# EAGLE board LilyPad_Vibeboard_Panel_v11 (EAGLE 6.5.0)
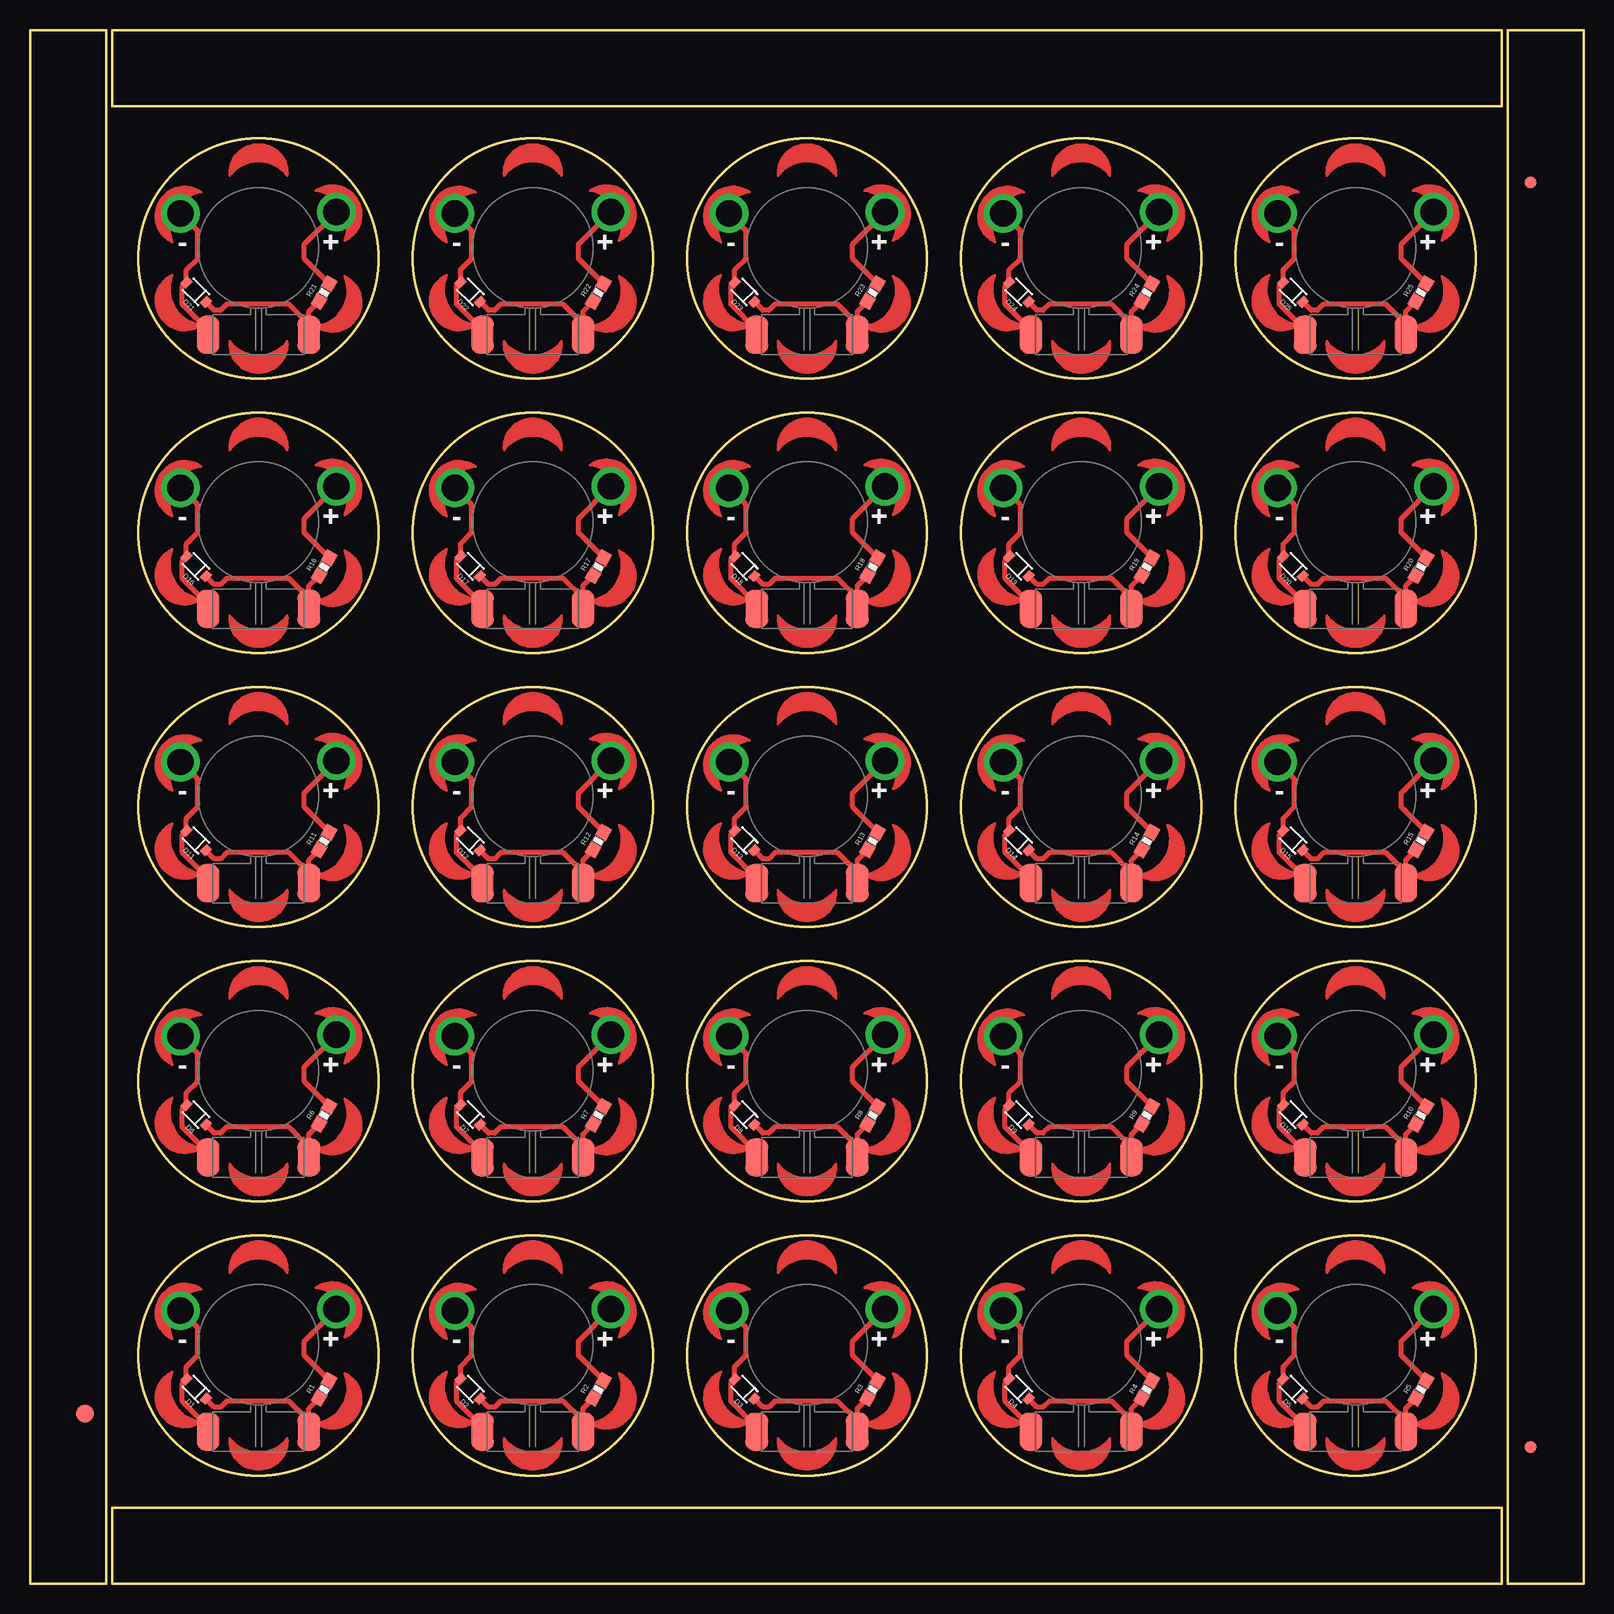
[diagram p0: board, top side]
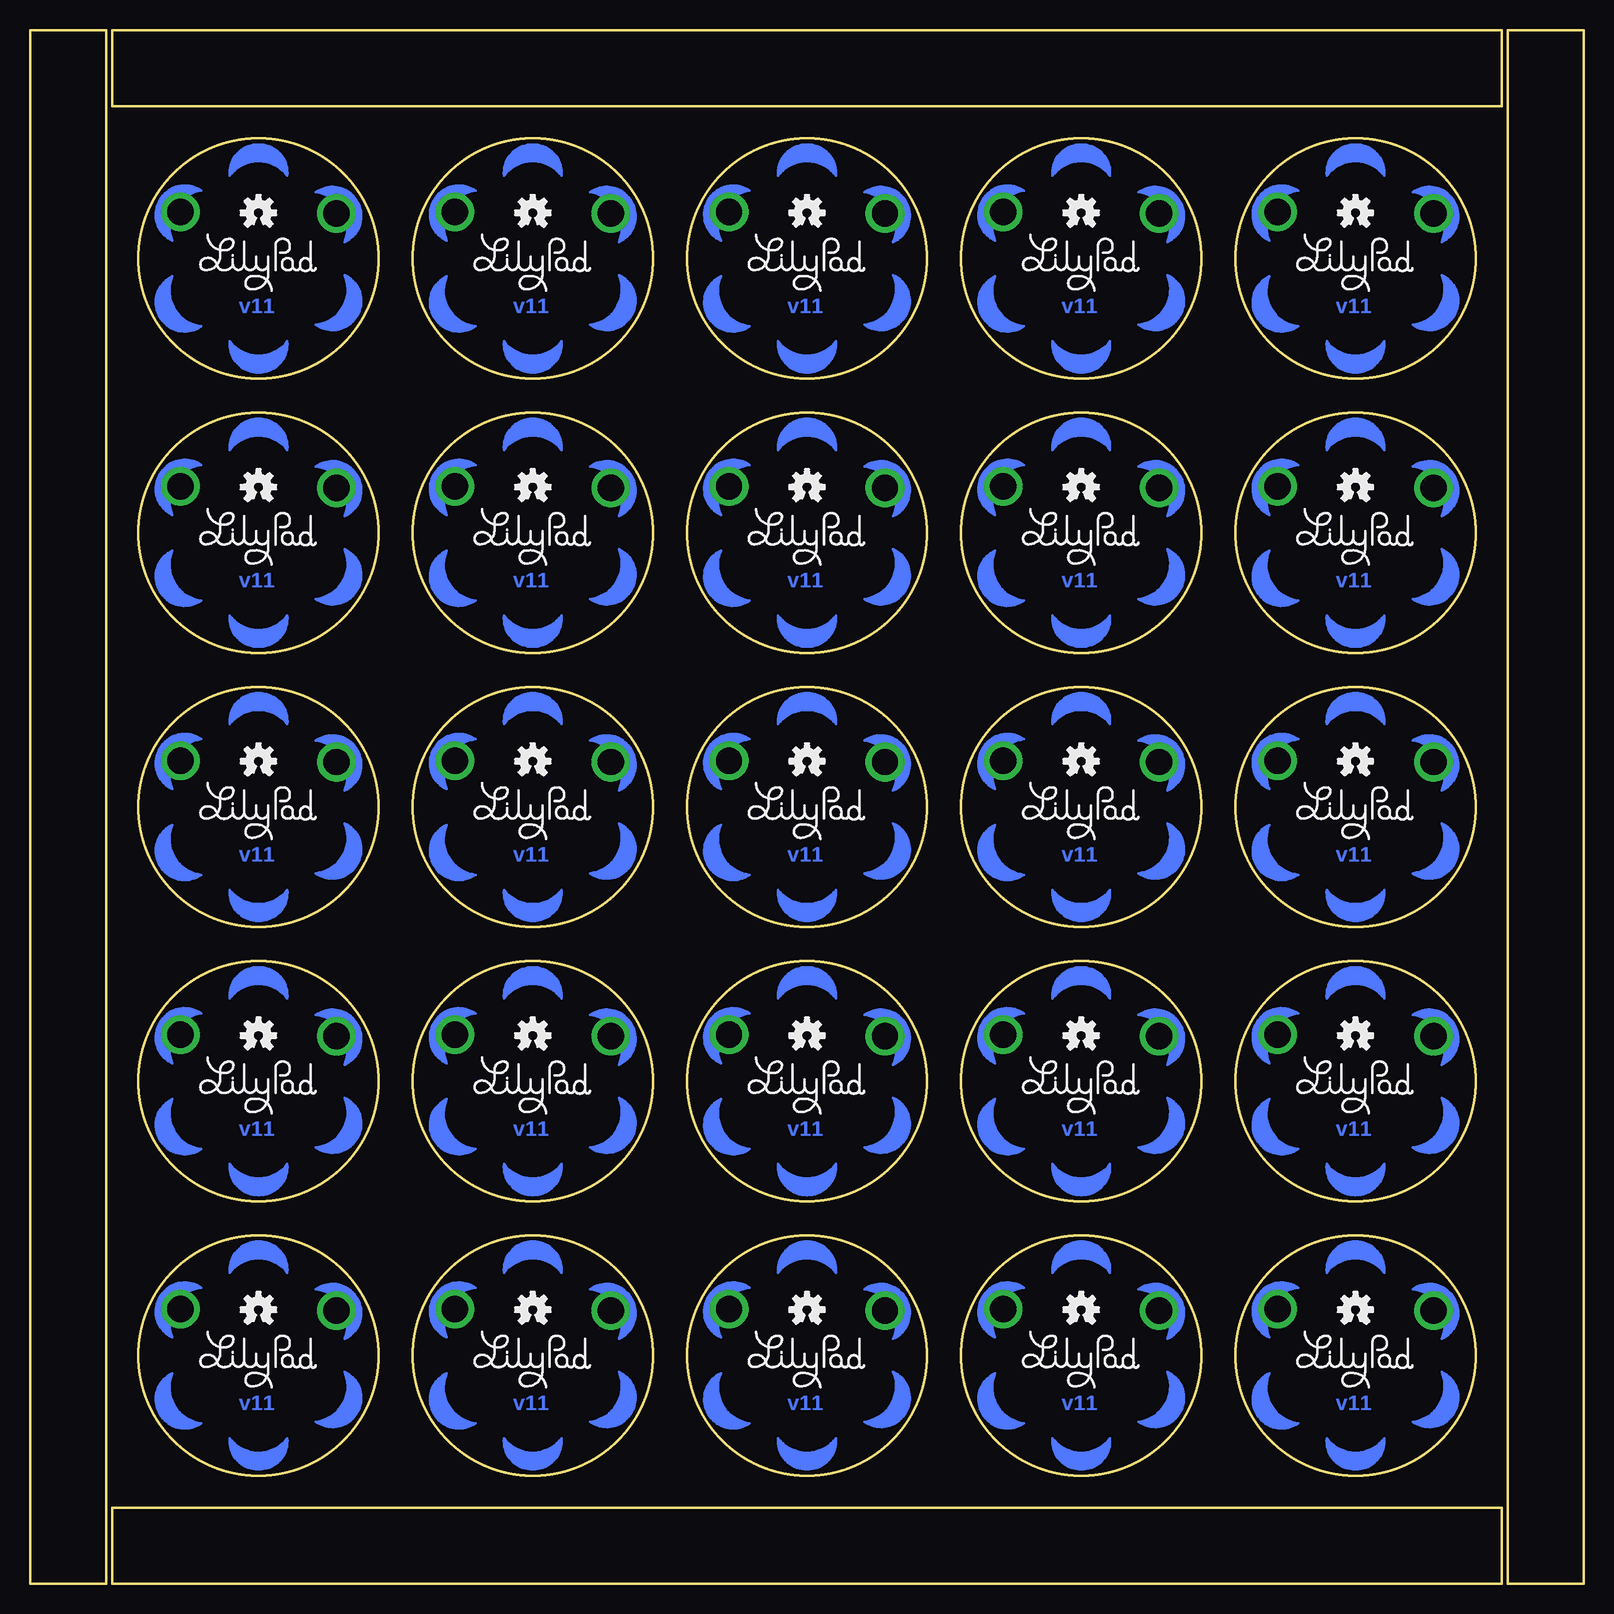
[diagram p1: board, bottom side, seen from below]

Size 129.54 x 129.54 mm. Coordinates in mm from the lower left corner, seen from the top.
Outline: 6.35,0 6.35,129.54 0,129.54 0,0 6.35,0
Outline: 6.86,0 122.68,0 122.68,6.35 6.86,6.35 6.86,0
Outline: 129.54,0 129.54,129.54 123.19,129.54 123.19,0 129.54,0
Outline: 122.68,129.54 6.86,129.54 6.86,123.19 122.68,123.19 122.68,129.54
Outline: circle at 19.05,19.05 radius 10
Outline: circle at 41.91,19.05 radius 10
Outline: circle at 64.77,19.05 radius 10
Outline: circle at 87.63,19.05 radius 10
Outline: circle at 110.49,19.05 radius 10
Outline: circle at 19.05,41.91 radius 10
Outline: circle at 41.91,41.91 radius 10
Outline: circle at 64.77,41.91 radius 10
Outline: circle at 87.63,41.91 radius 10
Outline: circle at 110.49,41.91 radius 10
Outline: circle at 19.05,64.77 radius 10
Outline: circle at 41.91,64.77 radius 10
Outline: circle at 64.77,64.77 radius 10
Outline: circle at 87.63,64.77 radius 10
Outline: circle at 110.49,64.77 radius 10
Outline: circle at 19.05,87.63 radius 10
Outline: circle at 41.91,87.63 radius 10
Outline: circle at 64.77,87.63 radius 10
Outline: circle at 87.63,87.63 radius 10
Outline: circle at 110.49,87.63 radius 10
Copper layers (1*16): Top 0.035mm / dielectric 1.5mm / Bottom 0.035mm
Design rules "SparkFun *": minimum track width 7mil, minimum drill 15mil, track to track 8mil, track to pad 8mil, pad to pad 8mil, via to via 8mil, smd to smd 8mil, copper to edge 8mil, drill to drill 8mil, minimum pad ring 12mil, minimum via ring 10mil, stop-mask expansion 4mil, vias tented up to drill 20mil, thermal gap 10mil

## Footprints (pad centres in the part's own frame; a part is rotated, then mirrored left to right if it is on the bottom)
SOD-323 = smd 0.63 x 0.83: 1 -1.15,0; 2 1.15,0
FIDUCIAL-1.5X3 = smd 1.5 x 1.5: 1 0,0
FIDUCIAL-1X2 = smd 1 x 1: 1 0,0
VIBE-MOTOR-10MM-SMD = smd 1.905 x 3.175: P$1 4.191,-7.239; P$2 -4.191,-7.239
0603-RES = smd 1.1 x 1: 1 -0.85,0; 2 0.85,0
PETAL-SMALL-2SIDE = drill 2.2: 1 0,0

## Placement (x,y rotation side)
D1  [SOD-323]  13.84,16.26 135 top
D2  [SOD-323]  36.7,16.26 135 top
D3  [SOD-323]  59.56,16.26 135 top
D4  [SOD-323]  82.42,16.26 135 top
D5  [SOD-323]  105.28,16.26 135 top
D6  [SOD-323]  13.84,39.12 135 top
D7  [SOD-323]  36.7,39.12 135 top
D8  [SOD-323]  59.56,39.12 135 top
D9  [SOD-323]  82.42,39.12 135 top
D10  [SOD-323]  105.28,39.12 135 top
D11  [SOD-323]  13.84,61.98 135 top
D12  [SOD-323]  36.7,61.98 135 top
D13  [SOD-323]  59.56,61.98 135 top
D14  [SOD-323]  82.42,61.98 135 top
D15  [SOD-323]  105.28,61.98 135 top
D16  [SOD-323]  13.84,84.84 135 top
D17  [SOD-323]  36.7,84.84 135 top
D18  [SOD-323]  59.56,84.84 135 top
D19  [SOD-323]  82.42,84.84 135 top
D20  [SOD-323]  105.28,84.84 135 top
D21  [SOD-323]  13.84,107.7 135 top
D22  [SOD-323]  36.7,107.7 135 top
D23  [SOD-323]  59.56,107.7 135 top
D24  [SOD-323]  82.42,107.7 135 top
D25  [SOD-323]  105.28,107.7 135 top
E$1  [FIDUCIAL-1.5X3]  4.57,14.22 0 top
E$4  [FIDUCIAL-1X2]  125.09,11.43 0 top
E$5  [FIDUCIAL-1X2]  125.09,116.84 180 top
LOGO1  OSHW-LOGOS  [OSHW-LOGO-S]  19.05,22.86 0 bottom
LOGO2  OSHW-LOGOS  [OSHW-LOGO-S]  41.91,22.86 0 bottom
LOGO3  OSHW-LOGOS  [OSHW-LOGO-S]  64.77,22.86 0 bottom
LOGO4  OSHW-LOGOS  [OSHW-LOGO-S]  87.63,22.86 0 bottom
LOGO5  OSHW-LOGOS  [OSHW-LOGO-S]  110.49,22.86 0 bottom
LOGO6  OSHW-LOGOS  [OSHW-LOGO-S]  19.05,45.72 0 bottom
LOGO7  OSHW-LOGOS  [OSHW-LOGO-S]  41.91,45.72 0 bottom
LOGO8  OSHW-LOGOS  [OSHW-LOGO-S]  64.77,45.72 0 bottom
LOGO9  OSHW-LOGOS  [OSHW-LOGO-S]  87.63,45.72 0 bottom
LOGO10  OSHW-LOGOS  [OSHW-LOGO-S]  110.49,45.72 0 bottom
LOGO11  OSHW-LOGOS  [OSHW-LOGO-S]  19.05,68.58 0 bottom
LOGO12  OSHW-LOGOS  [OSHW-LOGO-S]  41.91,68.58 0 bottom
LOGO13  OSHW-LOGOS  [OSHW-LOGO-S]  64.77,68.58 0 bottom
LOGO14  OSHW-LOGOS  [OSHW-LOGO-S]  87.63,68.58 0 bottom
LOGO15  OSHW-LOGOS  [OSHW-LOGO-S]  110.49,68.58 0 bottom
LOGO16  OSHW-LOGOS  [OSHW-LOGO-S]  19.05,91.44 0 bottom
LOGO17  OSHW-LOGOS  [OSHW-LOGO-S]  41.91,91.44 0 bottom
LOGO18  OSHW-LOGOS  [OSHW-LOGO-S]  64.77,91.44 0 bottom
LOGO19  OSHW-LOGOS  [OSHW-LOGO-S]  87.63,91.44 0 bottom
LOGO20  OSHW-LOGOS  [OSHW-LOGO-S]  110.49,91.44 0 bottom
LOGO21  OSHW-LOGOS  [OSHW-LOGO-S]  19.05,114.3 0 bottom
LOGO22  OSHW-LOGOS  [OSHW-LOGO-S]  41.91,114.3 0 bottom
LOGO23  OSHW-LOGOS  [OSHW-LOGO-S]  64.77,114.3 0 bottom
LOGO24  OSHW-LOGOS  [OSHW-LOGO-S]  87.63,114.3 0 bottom
LOGO25  OSHW-LOGOS  [OSHW-LOGO-S]  110.49,114.3 0 bottom
M1  MOTORSMD  [VIBE-MOTOR-10MM-SMD]  19.05,19.94 0 top
M2  MOTORSMD  [VIBE-MOTOR-10MM-SMD]  41.91,19.94 0 top
M3  MOTORSMD  [VIBE-MOTOR-10MM-SMD]  64.77,19.94 0 top
M4  MOTORSMD  [VIBE-MOTOR-10MM-SMD]  87.63,19.94 0 top
M5  MOTORSMD  [VIBE-MOTOR-10MM-SMD]  110.49,19.94 0 top
M6  MOTORSMD  [VIBE-MOTOR-10MM-SMD]  19.05,42.8 0 top
M7  MOTORSMD  [VIBE-MOTOR-10MM-SMD]  41.91,42.8 0 top
M8  MOTORSMD  [VIBE-MOTOR-10MM-SMD]  64.77,42.8 0 top
M9  MOTORSMD  [VIBE-MOTOR-10MM-SMD]  87.63,42.8 0 top
M10  MOTORSMD  [VIBE-MOTOR-10MM-SMD]  110.49,42.8 0 top
M11  MOTORSMD  [VIBE-MOTOR-10MM-SMD]  19.05,65.66 0 top
M12  MOTORSMD  [VIBE-MOTOR-10MM-SMD]  41.91,65.66 0 top
M13  MOTORSMD  [VIBE-MOTOR-10MM-SMD]  64.77,65.66 0 top
M14  MOTORSMD  [VIBE-MOTOR-10MM-SMD]  87.63,65.66 0 top
M15  MOTORSMD  [VIBE-MOTOR-10MM-SMD]  110.49,65.66 0 top
M16  MOTORSMD  [VIBE-MOTOR-10MM-SMD]  19.05,88.52 0 top
M17  MOTORSMD  [VIBE-MOTOR-10MM-SMD]  41.91,88.52 0 top
M18  MOTORSMD  [VIBE-MOTOR-10MM-SMD]  64.77,88.52 0 top
M19  MOTORSMD  [VIBE-MOTOR-10MM-SMD]  87.63,88.52 0 top
M20  MOTORSMD  [VIBE-MOTOR-10MM-SMD]  110.49,88.52 0 top
M21  MOTORSMD  [VIBE-MOTOR-10MM-SMD]  19.05,111.38 0 top
M22  MOTORSMD  [VIBE-MOTOR-10MM-SMD]  41.91,111.38 0 top
M23  MOTORSMD  [VIBE-MOTOR-10MM-SMD]  64.77,111.38 0 top
M24  MOTORSMD  [VIBE-MOTOR-10MM-SMD]  87.63,111.38 0 top
M25  MOTORSMD  [VIBE-MOTOR-10MM-SMD]  110.49,111.38 0 top
R1  33  [0603-RES]  24.52,16.22 60 top
R2  33  [0603-RES]  47.38,16.22 60 top
R3  33  [0603-RES]  70.24,16.22 60 top
R4  33  [0603-RES]  93.1,16.22 60 top
R5  33  [0603-RES]  115.96,16.22 60 top
R6  33  [0603-RES]  24.52,39.08 60 top
R7  33  [0603-RES]  47.38,39.08 60 top
R8  33  [0603-RES]  70.24,39.08 60 top
R9  33  [0603-RES]  93.1,39.08 60 top
R10  33  [0603-RES]  115.96,39.08 60 top
R11  33  [0603-RES]  24.52,61.94 60 top
R12  33  [0603-RES]  47.38,61.94 60 top
R13  33  [0603-RES]  70.24,61.94 60 top
R14  33  [0603-RES]  93.1,61.94 60 top
R15  33  [0603-RES]  115.96,61.94 60 top
R16  33  [0603-RES]  24.52,84.8 60 top
R17  33  [0603-RES]  47.38,84.8 60 top
R18  33  [0603-RES]  70.24,84.8 60 top
R19  33  [0603-RES]  93.1,84.8 60 top
R20  33  [0603-RES]  115.96,84.8 60 top
R21  33  [0603-RES]  24.52,107.66 60 top
R22  33  [0603-RES]  47.38,107.66 60 top
R23  33  [0603-RES]  70.24,107.66 60 top
R24  33  [0603-RES]  93.1,107.66 60 top
R25  33  [0603-RES]  115.96,107.66 60 top
U$1  LOGO-LPLP  [LOGO-LILYPAD]  41.91,19.05 0 bottom
U$2  LOGO-LPLP  [LOGO-LILYPAD]  19.05,19.05 0 bottom
U$3  LOGO-LPLP  [LOGO-LILYPAD]  64.77,19.05 0 bottom
U$4  LOGO-LPLP  [LOGO-LILYPAD]  87.63,19.05 0 bottom
U$5  LOGO-LPLP  [LOGO-LILYPAD]  110.49,19.05 0 bottom
U$6  LOGO-LPLP  [LOGO-LILYPAD]  19.05,41.91 0 bottom
U$7  LOGO-LPLP  [LOGO-LILYPAD]  41.91,41.91 0 bottom
U$8  LOGO-LPLP  [LOGO-LILYPAD]  64.77,41.91 0 bottom
U$9  LOGO-LPLP  [LOGO-LILYPAD]  87.63,41.91 0 bottom
U$10  LOGO-LPLP  [LOGO-LILYPAD]  110.49,41.91 0 bottom
U$11  LOGO-LPLP  [LOGO-LILYPAD]  19.05,64.77 0 bottom
U$12  LOGO-LPLP  [LOGO-LILYPAD]  41.91,64.77 0 bottom
U$13  LOGO-LPLP  [LOGO-LILYPAD]  64.77,64.77 0 bottom
U$14  LOGO-LPLP  [LOGO-LILYPAD]  87.63,64.77 0 bottom
U$15  LOGO-LPLP  [LOGO-LILYPAD]  110.49,64.77 0 bottom
U$16  LOGO-LPLP  [LOGO-LILYPAD]  19.05,87.63 0 bottom
U$17  LOGO-LPLP  [LOGO-LILYPAD]  41.91,87.63 0 bottom
U$18  LOGO-LPLP  [LOGO-LILYPAD]  64.77,87.63 0 bottom
U$19  LOGO-LPLP  [LOGO-LILYPAD]  87.63,87.63 0 bottom
U$20  LOGO-LPLP  [LOGO-LILYPAD]  110.49,87.63 0 bottom
U$21  LOGO-LPLP  [LOGO-LILYPAD]  19.05,110.49 0 bottom
U$22  LOGO-LPLP  [LOGO-LILYPAD]  41.91,110.49 0 bottom
U$23  LOGO-LPLP  [LOGO-LILYPAD]  64.77,110.49 0 bottom
U$24  LOGO-LPLP  [LOGO-LILYPAD]  87.63,110.49 0 bottom
U$25  LOGO-LPLP  [LOGO-LILYPAD]  110.49,110.49 0 bottom
VIBE1  SEWTAP-NOHOLE2  [PETAL-NOHOLE-2SIDE]  12.55,15.3 300 top
VIBE2  SEWTAP-NOHOLEW-MASK  [PETAL-NOHOLE-2SIDE-SPECIAL-W-MASK]  19.05,11.55 0 top
VIBE3  SEWTAP-NOHOLE2  [PETAL-NOHOLE-2SIDE]  25.55,15.18 60 top
VIBE4  SEWTAP-NOHOLE2  [PETAL-NOHOLE-2SIDE]  19.05,26.55 180 top
VIBE5  SEWTAP-NOHOLE2  [PETAL-NOHOLE-2SIDE]  48.41,15.18 60 top
VIBE6  SEWTAP-NOHOLEW-MASK  [PETAL-NOHOLE-2SIDE-SPECIAL-W-MASK]  41.91,11.55 0 top
VIBE7  SEWTAP-NOHOLE2  [PETAL-NOHOLE-2SIDE]  35.41,15.3 300 top
VIBE8  SEWTAP-NOHOLE2  [PETAL-NOHOLE-2SIDE]  41.91,26.55 180 top
VIBE9  SEWTAP-NOHOLE2  [PETAL-NOHOLE-2SIDE]  71.27,15.18 60 top
VIBE10  SEWTAP-NOHOLEW-MASK  [PETAL-NOHOLE-2SIDE-SPECIAL-W-MASK]  64.77,11.55 0 top
VIBE11  SEWTAP-NOHOLE2  [PETAL-NOHOLE-2SIDE]  58.27,15.3 300 top
VIBE12  SEWTAP-NOHOLE2  [PETAL-NOHOLE-2SIDE]  64.77,26.55 180 top
VIBE13  SEWTAP-NOHOLE2  [PETAL-NOHOLE-2SIDE]  94.13,15.18 60 top
VIBE14  SEWTAP-NOHOLEW-MASK  [PETAL-NOHOLE-2SIDE-SPECIAL-W-MASK]  87.63,11.55 0 top
VIBE15  SEWTAP-NOHOLE2  [PETAL-NOHOLE-2SIDE]  81.13,15.3 300 top
VIBE16  SEWTAP-NOHOLE2  [PETAL-NOHOLE-2SIDE]  87.63,26.55 180 top
VIBE17  SEWTAP-NOHOLE2  [PETAL-NOHOLE-2SIDE]  116.99,15.18 60 top
VIBE18  SEWTAP-NOHOLEW-MASK  [PETAL-NOHOLE-2SIDE-SPECIAL-W-MASK]  110.49,11.55 0 top
VIBE19  SEWTAP-NOHOLE2  [PETAL-NOHOLE-2SIDE]  103.99,15.3 300 top
VIBE20  SEWTAP-NOHOLE2  [PETAL-NOHOLE-2SIDE]  110.49,26.55 180 top
VIBE21  SEWTAP-NOHOLE2  [PETAL-NOHOLE-2SIDE]  25.55,38.04 60 top
VIBE22  SEWTAP-NOHOLEW-MASK  [PETAL-NOHOLE-2SIDE-SPECIAL-W-MASK]  19.05,34.41 0 top
VIBE23  SEWTAP-NOHOLE2  [PETAL-NOHOLE-2SIDE]  12.55,38.16 300 top
VIBE24  SEWTAP-NOHOLE2  [PETAL-NOHOLE-2SIDE]  19.05,49.41 180 top
VIBE25  SEWTAP-NOHOLE2  [PETAL-NOHOLE-2SIDE]  48.41,38.04 60 top
VIBE26  SEWTAP-NOHOLEW-MASK  [PETAL-NOHOLE-2SIDE-SPECIAL-W-MASK]  41.91,34.41 0 top
VIBE27  SEWTAP-NOHOLE2  [PETAL-NOHOLE-2SIDE]  35.41,38.16 300 top
VIBE28  SEWTAP-NOHOLE2  [PETAL-NOHOLE-2SIDE]  41.91,49.41 180 top
VIBE29  SEWTAP-NOHOLE2  [PETAL-NOHOLE-2SIDE]  71.27,38.04 60 top
VIBE30  SEWTAP-NOHOLEW-MASK  [PETAL-NOHOLE-2SIDE-SPECIAL-W-MASK]  64.77,34.41 0 top
VIBE31  SEWTAP-NOHOLE2  [PETAL-NOHOLE-2SIDE]  58.27,38.16 300 top
VIBE32  SEWTAP-NOHOLE2  [PETAL-NOHOLE-2SIDE]  64.77,49.41 180 top
VIBE33  SEWTAP-NOHOLE2  [PETAL-NOHOLE-2SIDE]  94.13,38.04 60 top
VIBE34  SEWTAP-NOHOLEW-MASK  [PETAL-NOHOLE-2SIDE-SPECIAL-W-MASK]  87.63,34.41 0 top
VIBE35  SEWTAP-NOHOLE2  [PETAL-NOHOLE-2SIDE]  81.13,38.16 300 top
VIBE36  SEWTAP-NOHOLE2  [PETAL-NOHOLE-2SIDE]  87.63,49.41 180 top
VIBE37  SEWTAP-NOHOLE2  [PETAL-NOHOLE-2SIDE]  116.99,38.04 60 top
VIBE38  SEWTAP-NOHOLEW-MASK  [PETAL-NOHOLE-2SIDE-SPECIAL-W-MASK]  110.49,34.41 0 top
VIBE39  SEWTAP-NOHOLE2  [PETAL-NOHOLE-2SIDE]  103.99,38.16 300 top
VIBE40  SEWTAP-NOHOLE2  [PETAL-NOHOLE-2SIDE]  110.49,49.41 180 top
VIBE41  SEWTAP-NOHOLE2  [PETAL-NOHOLE-2SIDE]  25.55,60.9 60 top
VIBE42  SEWTAP-NOHOLEW-MASK  [PETAL-NOHOLE-2SIDE-SPECIAL-W-MASK]  19.05,57.27 0 top
VIBE43  SEWTAP-NOHOLE2  [PETAL-NOHOLE-2SIDE]  12.55,61.02 300 top
VIBE44  SEWTAP-NOHOLE2  [PETAL-NOHOLE-2SIDE]  19.05,72.27 180 top
VIBE45  SEWTAP-NOHOLE2  [PETAL-NOHOLE-2SIDE]  48.41,60.9 60 top
VIBE46  SEWTAP-NOHOLEW-MASK  [PETAL-NOHOLE-2SIDE-SPECIAL-W-MASK]  41.91,57.27 0 top
VIBE47  SEWTAP-NOHOLE2  [PETAL-NOHOLE-2SIDE]  35.41,61.02 300 top
VIBE48  SEWTAP-NOHOLE2  [PETAL-NOHOLE-2SIDE]  41.91,72.27 180 top
VIBE49  SEWTAP-NOHOLE2  [PETAL-NOHOLE-2SIDE]  71.27,60.9 60 top
VIBE50  SEWTAP-NOHOLEW-MASK  [PETAL-NOHOLE-2SIDE-SPECIAL-W-MASK]  64.77,57.27 0 top
VIBE51  SEWTAP-NOHOLE2  [PETAL-NOHOLE-2SIDE]  58.27,61.02 300 top
VIBE52  SEWTAP-NOHOLE2  [PETAL-NOHOLE-2SIDE]  64.77,72.27 180 top
VIBE53  SEWTAP-NOHOLE2  [PETAL-NOHOLE-2SIDE]  94.13,60.9 60 top
VIBE54  SEWTAP-NOHOLEW-MASK  [PETAL-NOHOLE-2SIDE-SPECIAL-W-MASK]  87.63,57.27 0 top
VIBE55  SEWTAP-NOHOLE2  [PETAL-NOHOLE-2SIDE]  81.13,61.02 300 top
VIBE56  SEWTAP-NOHOLE2  [PETAL-NOHOLE-2SIDE]  87.63,72.27 180 top
VIBE57  SEWTAP-NOHOLE2  [PETAL-NOHOLE-2SIDE]  116.99,60.9 60 top
VIBE58  SEWTAP-NOHOLEW-MASK  [PETAL-NOHOLE-2SIDE-SPECIAL-W-MASK]  110.49,57.27 0 top
VIBE59  SEWTAP-NOHOLE2  [PETAL-NOHOLE-2SIDE]  103.99,61.02 300 top
VIBE60  SEWTAP-NOHOLE2  [PETAL-NOHOLE-2SIDE]  110.49,72.27 180 top
VIBE61  SEWTAP-NOHOLE2  [PETAL-NOHOLE-2SIDE]  25.55,83.76 60 top
VIBE62  SEWTAP-NOHOLEW-MASK  [PETAL-NOHOLE-2SIDE-SPECIAL-W-MASK]  19.05,80.13 0 top
VIBE63  SEWTAP-NOHOLE2  [PETAL-NOHOLE-2SIDE]  12.55,83.88 300 top
VIBE64  SEWTAP-NOHOLE2  [PETAL-NOHOLE-2SIDE]  19.05,95.13 180 top
VIBE65  SEWTAP-NOHOLE2  [PETAL-NOHOLE-2SIDE]  48.41,83.76 60 top
VIBE66  SEWTAP-NOHOLEW-MASK  [PETAL-NOHOLE-2SIDE-SPECIAL-W-MASK]  41.91,80.13 0 top
VIBE67  SEWTAP-NOHOLE2  [PETAL-NOHOLE-2SIDE]  35.41,83.88 300 top
VIBE68  SEWTAP-NOHOLE2  [PETAL-NOHOLE-2SIDE]  41.91,95.13 180 top
VIBE69  SEWTAP-NOHOLE2  [PETAL-NOHOLE-2SIDE]  71.27,83.76 60 top
VIBE70  SEWTAP-NOHOLEW-MASK  [PETAL-NOHOLE-2SIDE-SPECIAL-W-MASK]  64.77,80.13 0 top
VIBE71  SEWTAP-NOHOLE2  [PETAL-NOHOLE-2SIDE]  58.27,83.88 300 top
VIBE72  SEWTAP-NOHOLE2  [PETAL-NOHOLE-2SIDE]  64.77,95.13 180 top
VIBE73  SEWTAP-NOHOLE2  [PETAL-NOHOLE-2SIDE]  94.13,83.76 60 top
VIBE74  SEWTAP-NOHOLEW-MASK  [PETAL-NOHOLE-2SIDE-SPECIAL-W-MASK]  87.63,80.13 0 top
VIBE75  SEWTAP-NOHOLE2  [PETAL-NOHOLE-2SIDE]  81.13,83.88 300 top
VIBE76  SEWTAP-NOHOLE2  [PETAL-NOHOLE-2SIDE]  87.63,95.13 180 top
VIBE77  SEWTAP-NOHOLE2  [PETAL-NOHOLE-2SIDE]  116.99,83.76 60 top
VIBE78  SEWTAP-NOHOLEW-MASK  [PETAL-NOHOLE-2SIDE-SPECIAL-W-MASK]  110.49,80.13 0 top
VIBE79  SEWTAP-NOHOLE2  [PETAL-NOHOLE-2SIDE]  103.99,83.88 300 top
VIBE80  SEWTAP-NOHOLE2  [PETAL-NOHOLE-2SIDE]  110.49,95.13 180 top
VIBE81  SEWTAP-NOHOLE2  [PETAL-NOHOLE-2SIDE]  25.55,106.62 60 top
VIBE82  SEWTAP-NOHOLEW-MASK  [PETAL-NOHOLE-2SIDE-SPECIAL-W-MASK]  19.05,102.99 0 top
VIBE83  SEWTAP-NOHOLE2  [PETAL-NOHOLE-2SIDE]  12.55,106.74 300 top
VIBE84  SEWTAP-NOHOLE2  [PETAL-NOHOLE-2SIDE]  19.05,117.99 180 top
VIBE85  SEWTAP-NOHOLE2  [PETAL-NOHOLE-2SIDE]  48.41,106.62 60 top
VIBE86  SEWTAP-NOHOLEW-MASK  [PETAL-NOHOLE-2SIDE-SPECIAL-W-MASK]  41.91,102.99 0 top
VIBE87  SEWTAP-NOHOLE2  [PETAL-NOHOLE-2SIDE]  35.41,106.74 300 top
VIBE88  SEWTAP-NOHOLE2  [PETAL-NOHOLE-2SIDE]  41.91,117.99 180 top
VIBE89  SEWTAP-NOHOLE2  [PETAL-NOHOLE-2SIDE]  71.27,106.62 60 top
VIBE90  SEWTAP-NOHOLEW-MASK  [PETAL-NOHOLE-2SIDE-SPECIAL-W-MASK]  64.77,102.99 0 top
VIBE91  SEWTAP-NOHOLE2  [PETAL-NOHOLE-2SIDE]  58.27,106.74 300 top
VIBE92  SEWTAP-NOHOLE2  [PETAL-NOHOLE-2SIDE]  64.77,117.99 180 top
VIBE93  SEWTAP-NOHOLE2  [PETAL-NOHOLE-2SIDE]  94.13,106.62 60 top
VIBE94  SEWTAP-NOHOLEW-MASK  [PETAL-NOHOLE-2SIDE-SPECIAL-W-MASK]  87.63,102.99 0 top
VIBE95  SEWTAP-NOHOLE2  [PETAL-NOHOLE-2SIDE]  81.13,106.74 300 top
VIBE96  SEWTAP-NOHOLE2  [PETAL-NOHOLE-2SIDE]  87.63,117.99 180 top
VIBE97  SEWTAP-NOHOLE2  [PETAL-NOHOLE-2SIDE]  116.99,106.62 60 top
VIBE98  SEWTAP-NOHOLEW-MASK  [PETAL-NOHOLE-2SIDE-SPECIAL-W-MASK]  110.49,102.99 0 top
VIBE99  SEWTAP-NOHOLE2  [PETAL-NOHOLE-2SIDE]  103.99,106.74 300 top
VIBE100  SEWTAP-NOHOLE2  [PETAL-NOHOLE-2SIDE]  110.49,117.99 180 top
VIBE+  SEWTAP6  [PETAL-SMALL-2SIDE]  25.55,22.92 120 top
VIBE+1  SEWTAP6  [PETAL-SMALL-2SIDE]  48.41,22.92 120 top
VIBE+2  SEWTAP6  [PETAL-SMALL-2SIDE]  71.27,22.92 120 top
VIBE+3  SEWTAP6  [PETAL-SMALL-2SIDE]  94.13,22.92 120 top
VIBE+4  SEWTAP6  [PETAL-SMALL-2SIDE]  116.99,22.92 120 top
VIBE+5  SEWTAP6  [PETAL-SMALL-2SIDE]  25.55,45.78 120 top
VIBE+6  SEWTAP6  [PETAL-SMALL-2SIDE]  48.41,45.78 120 top
VIBE+7  SEWTAP6  [PETAL-SMALL-2SIDE]  71.27,45.78 120 top
VIBE+8  SEWTAP6  [PETAL-SMALL-2SIDE]  94.13,45.78 120 top
VIBE+9  SEWTAP6  [PETAL-SMALL-2SIDE]  116.99,45.78 120 top
VIBE+10  SEWTAP6  [PETAL-SMALL-2SIDE]  25.55,68.64 120 top
VIBE+11  SEWTAP6  [PETAL-SMALL-2SIDE]  48.41,68.64 120 top
VIBE+12  SEWTAP6  [PETAL-SMALL-2SIDE]  71.27,68.64 120 top
VIBE+13  SEWTAP6  [PETAL-SMALL-2SIDE]  94.13,68.64 120 top
VIBE+14  SEWTAP6  [PETAL-SMALL-2SIDE]  116.99,68.64 120 top
VIBE+15  SEWTAP6  [PETAL-SMALL-2SIDE]  25.55,91.5 120 top
VIBE+16  SEWTAP6  [PETAL-SMALL-2SIDE]  48.41,91.5 120 top
VIBE+17  SEWTAP6  [PETAL-SMALL-2SIDE]  71.27,91.5 120 top
VIBE+18  SEWTAP6  [PETAL-SMALL-2SIDE]  94.13,91.5 120 top
VIBE+19  SEWTAP6  [PETAL-SMALL-2SIDE]  116.99,91.5 120 top
VIBE+20  SEWTAP6  [PETAL-SMALL-2SIDE]  25.55,114.36 120 top
VIBE+21  SEWTAP6  [PETAL-SMALL-2SIDE]  48.41,114.36 120 top
VIBE+22  SEWTAP6  [PETAL-SMALL-2SIDE]  71.27,114.36 120 top
VIBE+23  SEWTAP6  [PETAL-SMALL-2SIDE]  94.13,114.36 120 top
VIBE+24  SEWTAP6  [PETAL-SMALL-2SIDE]  116.99,114.36 120 top
VIBE-  SEWTAP6  [PETAL-SMALL-2SIDE]  12.55,22.8 240 top
VIBE-1  SEWTAP6  [PETAL-SMALL-2SIDE]  35.41,22.8 240 top
VIBE-2  SEWTAP6  [PETAL-SMALL-2SIDE]  58.27,22.8 240 top
VIBE-3  SEWTAP6  [PETAL-SMALL-2SIDE]  81.13,22.8 240 top
VIBE-4  SEWTAP6  [PETAL-SMALL-2SIDE]  103.99,22.8 240 top
VIBE-5  SEWTAP6  [PETAL-SMALL-2SIDE]  12.55,45.66 240 top
VIBE-6  SEWTAP6  [PETAL-SMALL-2SIDE]  35.41,45.66 240 top
VIBE-7  SEWTAP6  [PETAL-SMALL-2SIDE]  58.27,45.66 240 top
VIBE-8  SEWTAP6  [PETAL-SMALL-2SIDE]  81.13,45.66 240 top
VIBE-9  SEWTAP6  [PETAL-SMALL-2SIDE]  103.99,45.66 240 top
VIBE-10  SEWTAP6  [PETAL-SMALL-2SIDE]  12.55,68.52 240 top
VIBE-11  SEWTAP6  [PETAL-SMALL-2SIDE]  35.41,68.52 240 top
VIBE-12  SEWTAP6  [PETAL-SMALL-2SIDE]  58.27,68.52 240 top
VIBE-13  SEWTAP6  [PETAL-SMALL-2SIDE]  81.13,68.52 240 top
VIBE-14  SEWTAP6  [PETAL-SMALL-2SIDE]  103.99,68.52 240 top
VIBE-15  SEWTAP6  [PETAL-SMALL-2SIDE]  12.55,91.38 240 top
VIBE-16  SEWTAP6  [PETAL-SMALL-2SIDE]  35.41,91.38 240 top
VIBE-17  SEWTAP6  [PETAL-SMALL-2SIDE]  58.27,91.38 240 top
VIBE-18  SEWTAP6  [PETAL-SMALL-2SIDE]  81.13,91.38 240 top
VIBE-19  SEWTAP6  [PETAL-SMALL-2SIDE]  103.99,91.38 240 top
VIBE-20  SEWTAP6  [PETAL-SMALL-2SIDE]  12.55,114.24 240 top
VIBE-21  SEWTAP6  [PETAL-SMALL-2SIDE]  35.41,114.24 240 top
VIBE-22  SEWTAP6  [PETAL-SMALL-2SIDE]  58.27,114.24 240 top
VIBE-23  SEWTAP6  [PETAL-SMALL-2SIDE]  81.13,114.24 240 top
VIBE-24  SEWTAP6  [PETAL-SMALL-2SIDE]  103.99,114.24 240 top

## Library data of the parts
D1-D25 = SparkFun
E$1 E$4 E$5 LOGO1-LOGO25 = SparkFun-Aesthetics
M1-M25 VIBE2 VIBE6 VIBE10 VIBE14 VIBE18 VIBE22 VIBE26 VIBE30 VIBE34 VIBE38 VIBE42 VIBE46 VIBE50 VIBE54 VIBE58 VIBE62 VIBE66 VIBE70 VIBE74 VIBE78 VIBE82 VIBE86 VIBE90 VIBE94 VIBE98 = Testing
R1-R25 = SparkFun-Resistors; PROD_ID: RES-08416
U$1-U$25 VIBE1 VIBE3-VIBE5 VIBE7-VIBE9 VIBE11-VIBE13 VIBE15-VIBE17 VIBE19-VIBE21 VIBE23-VIBE25 VIBE27-VIBE29 VIBE31-VIBE33 VIBE35-VIBE37 VIBE39-VIBE41 VIBE43-VIBE45 VIBE47-VIBE49 VIBE51-VIBE53 VIBE55-VIBE57 VIBE59-VIBE61 VIBE63-VIBE65 VIBE67-VIBE69 VIBE71-VIBE73 VIBE75-VIBE77 VIBE79-VIBE81 VIBE83-VIBE85 VIBE87-VIBE89 VIBE91-VIBE93 VIBE95-VIBE97 VIBE99 VIBE100 VIBE+ VIBE+1-VIBE+24 VIBE- VIBE-1-VIBE-24 = LilyPad-Wearables

## Nets
5V: R1.2 VIBE+.1
5V1: R2.2 VIBE+1.1
5V2: R3.2 VIBE+2.1
5V3: R4.2 VIBE+3.1
5V4: R5.2 VIBE+4.1
5V5: R6.2 VIBE+5.1
5V6: R7.2 VIBE+6.1
5V7: R8.2 VIBE+7.1
5V8: R9.2 VIBE+8.1
5V9: R10.2 VIBE+9.1
5V10: R11.2 VIBE+10.1
5V11: R12.2 VIBE+11.1
5V12: R13.2 VIBE+12.1
5V13: R14.2 VIBE+13.1
5V14: R15.2 VIBE+14.1
5V15: R16.2 VIBE+15.1
5V16: R17.2 VIBE+16.1
5V17: R18.2 VIBE+17.1
5V18: R19.2 VIBE+18.1
5V19: R20.2 VIBE+19.1
5V20: R21.2 VIBE+20.1
5V21: R22.2 VIBE+21.1
5V22: R23.2 VIBE+22.1
5V23: R24.2 VIBE+23.1
5V24: R25.2 VIBE+24.1
GND: D1.2 M1.P$2 VIBE-.1
GND1: D2.2 M2.P$2 VIBE-1.1
GND2: D3.2 M3.P$2 VIBE-2.1
GND3: D4.2 M4.P$2 VIBE-3.1
GND4: D5.2 M5.P$2 VIBE-4.1
GND5: D6.2 M6.P$2 VIBE-5.1
GND6: D7.2 M7.P$2 VIBE-6.1
GND7: D8.2 M8.P$2 VIBE-7.1
GND8: D9.2 M9.P$2 VIBE-8.1
GND9: D10.2 M10.P$2 VIBE-9.1
GND10: D11.2 M11.P$2 VIBE-10.1
GND11: D12.2 M12.P$2 VIBE-11.1
GND12: D13.2 M13.P$2 VIBE-12.1
GND13: D14.2 M14.P$2 VIBE-13.1
GND14: D15.2 M15.P$2 VIBE-14.1
GND15: D16.2 M16.P$2 VIBE-15.1
GND16: D17.2 M17.P$2 VIBE-16.1
GND17: D18.2 M18.P$2 VIBE-17.1
GND18: D19.2 M19.P$2 VIBE-18.1
GND19: D20.2 M20.P$2 VIBE-19.1
GND20: D21.2 M21.P$2 VIBE-20.1
GND21: D22.2 M22.P$2 VIBE-21.1
GND22: D23.2 M23.P$2 VIBE-22.1
GND23: D24.2 M24.P$2 VIBE-23.1
GND24: D25.2 M25.P$2 VIBE-24.1
N$1: D1.1 M1.P$1 R1.1
N$2: D2.1 M2.P$1 R2.1
N$3: D3.1 M3.P$1 R3.1
N$4: D4.1 M4.P$1 R4.1
N$5: D5.1 M5.P$1 R5.1
N$6: D6.1 M6.P$1 R6.1
N$7: D7.1 M7.P$1 R7.1
N$8: D8.1 M8.P$1 R8.1
N$9: D9.1 M9.P$1 R9.1
N$10: D10.1 M10.P$1 R10.1
N$11: D11.1 M11.P$1 R11.1
N$12: D12.1 M12.P$1 R12.1
N$13: D13.1 M13.P$1 R13.1
N$14: D14.1 M14.P$1 R14.1
N$15: D15.1 M15.P$1 R15.1
N$16: D16.1 M16.P$1 R16.1
N$17: D17.1 M17.P$1 R17.1
N$18: D18.1 M18.P$1 R18.1
N$19: D19.1 M19.P$1 R19.1
N$20: D20.1 M20.P$1 R20.1
N$21: D21.1 M21.P$1 R21.1
N$22: D22.1 M22.P$1 R22.1
N$23: D23.1 M23.P$1 R23.1
N$24: D24.1 M24.P$1 R24.1
N$25: D25.1 M25.P$1 R25.1

## Tracks (layer width: path | path; a pad name or v marks a point on that pad's centre or on a via)
5V
  Top 0.406: R1.2 24.94,16.97 22.86,19.05 22.86,20.23 VIBE+.1
5V1
  Top 0.406: R2.2 47.8,16.97 45.72,19.05 45.72,20.23 VIBE+1.1
5V2
  Top 0.406: R3.2 70.66,16.97 68.58,19.05 68.58,20.23 VIBE+2.1
5V3
  Top 0.406: R4.2 93.52,16.97 91.44,19.05 91.44,20.23 VIBE+3.1
5V4
  Top 0.406: R5.2 116.38,16.97 114.3,19.05 114.3,20.23 VIBE+4.1
5V5
  Top 0.406: R6.2 24.94,39.83 22.86,41.91 22.86,43.09 VIBE+5.1
5V6
  Top 0.406: R7.2 47.8,39.83 45.72,41.91 45.72,43.09 VIBE+6.1
5V7
  Top 0.406: R8.2 70.66,39.83 68.58,41.91 68.58,43.09 VIBE+7.1
5V8
  Top 0.406: R9.2 93.52,39.83 91.44,41.91 91.44,43.09 VIBE+8.1
5V9
  Top 0.406: R10.2 116.38,39.83 114.3,41.91 114.3,43.09 VIBE+9.1
5V10
  Top 0.406: R11.2 24.94,62.69 22.86,64.77 22.86,65.95 VIBE+10.1
5V11
  Top 0.406: R12.2 47.8,62.69 45.72,64.77 45.72,65.95 VIBE+11.1
5V12
  Top 0.406: R13.2 70.66,62.69 68.58,64.77 68.58,65.95 VIBE+12.1
5V13
  Top 0.406: R14.2 93.52,62.69 91.44,64.77 91.44,65.95 VIBE+13.1
5V14
  Top 0.406: R15.2 116.38,62.69 114.3,64.77 114.3,65.95 VIBE+14.1
5V15
  Top 0.406: R16.2 24.94,85.55 22.86,87.63 22.86,88.81 VIBE+15.1
5V16
  Top 0.406: R17.2 47.8,85.55 45.72,87.63 45.72,88.81 VIBE+16.1
5V17
  Top 0.406: R18.2 70.66,85.55 68.58,87.63 68.58,88.81 VIBE+17.1
5V18
  Top 0.406: R19.2 93.52,85.55 91.44,87.63 91.44,88.81 VIBE+18.1
5V19
  Top 0.406: R20.2 116.38,85.55 114.3,87.63 114.3,88.81 VIBE+19.1
5V20
  Top 0.406: R21.2 24.94,108.41 22.86,110.49 22.86,111.67 VIBE+20.1
5V21
  Top 0.406: R22.2 47.8,108.41 45.72,110.49 45.72,111.67 VIBE+21.1
5V22
  Top 0.406: R23.2 70.66,108.41 68.58,110.49 68.58,111.67 VIBE+22.1
5V23
  Top 0.406: R24.2 93.52,108.41 91.44,110.49 91.44,111.67 VIBE+23.1
5V24
  Top 0.406: R25.2 116.38,108.41 114.3,110.49 114.3,111.67 VIBE+24.1
GND
  Top 0.406: M1.P$2 14.86,13.08 12.7,15.24 12.7,16.74 D1.2 13.03,18.11 13.97,19.05 13.97,21.38 VIBE-.1
GND1
  Top 0.406: M2.P$2 37.72,13.08 35.56,15.24 35.56,16.74 D2.2 35.89,18.11 36.83,19.05 36.83,21.38 VIBE-1.1
GND2
  Top 0.406: M3.P$2 60.58,13.08 58.42,15.24 58.42,16.74 D3.2 58.75,18.11 59.69,19.05 59.69,21.38 VIBE-2.1
GND3
  Top 0.406: M4.P$2 83.44,13.08 81.28,15.24 81.28,16.74 D4.2 81.61,18.11 82.55,19.05 82.55,21.38 VIBE-3.1
GND4
  Top 0.406: M5.P$2 106.3,13.08 104.14,15.24 104.14,16.74 D5.2 104.47,18.11 105.41,19.05 105.41,21.38 VIBE-4.1
GND5
  Top 0.406: M6.P$2 14.86,35.94 12.7,38.1 12.7,39.6 D6.2 13.03,40.97 13.97,41.91 13.97,44.24 VIBE-5.1
GND6
  Top 0.406: M7.P$2 37.72,35.94 35.56,38.1 35.56,39.6 D7.2 35.89,40.97 36.83,41.91 36.83,44.24 VIBE-6.1
GND7
  Top 0.406: M8.P$2 60.58,35.94 58.42,38.1 58.42,39.6 D8.2 58.75,40.97 59.69,41.91 59.69,44.24 VIBE-7.1
GND8
  Top 0.406: M9.P$2 83.44,35.94 81.28,38.1 81.28,39.6 D9.2 81.61,40.97 82.55,41.91 82.55,44.24 VIBE-8.1
GND9
  Top 0.406: M10.P$2 106.3,35.94 104.14,38.1 104.14,39.6 D10.2 104.47,40.97 105.41,41.91 105.41,44.24 VIBE-9.1
GND10
  Top 0.406: M11.P$2 14.86,58.8 12.7,60.96 12.7,62.46 D11.2 13.03,63.83 13.97,64.77 13.97,67.1 VIBE-10.1
GND11
  Top 0.406: M12.P$2 37.72,58.8 35.56,60.96 35.56,62.46 D12.2 35.89,63.83 36.83,64.77 36.83,67.1 VIBE-11.1
GND12
  Top 0.406: M13.P$2 60.58,58.8 58.42,60.96 58.42,62.46 D13.2 58.75,63.83 59.69,64.77 59.69,67.1 VIBE-12.1
GND13
  Top 0.406: M14.P$2 83.44,58.8 81.28,60.96 81.28,62.46 D14.2 81.61,63.83 82.55,64.77 82.55,67.1 VIBE-13.1
GND14
  Top 0.406: M15.P$2 106.3,58.8 104.14,60.96 104.14,62.46 D15.2 104.47,63.83 105.41,64.77 105.41,67.1 VIBE-14.1
GND15
  Top 0.406: M16.P$2 14.86,81.66 12.7,83.82 12.7,85.32 D16.2 13.03,86.69 13.97,87.63 13.97,89.96 VIBE-15.1
GND16
  Top 0.406: M17.P$2 37.72,81.66 35.56,83.82 35.56,85.32 D17.2 35.89,86.69 36.83,87.63 36.83,89.96 VIBE-16.1
GND17
  Top 0.406: M18.P$2 60.58,81.66 58.42,83.82 58.42,85.32 D18.2 58.75,86.69 59.69,87.63 59.69,89.96 VIBE-17.1
GND18
  Top 0.406: M19.P$2 83.44,81.66 81.28,83.82 81.28,85.32 D19.2 81.61,86.69 82.55,87.63 82.55,89.96 VIBE-18.1
GND19
  Top 0.406: M20.P$2 106.3,81.66 104.14,83.82 104.14,85.32 D20.2 104.47,86.69 105.41,87.63 105.41,89.96 VIBE-19.1
GND20
  Top 0.406: M21.P$2 14.86,104.52 12.7,106.68 12.7,108.18 D21.2 13.03,109.55 13.97,110.49 13.97,112.82 VIBE-20.1
GND21
  Top 0.406: M22.P$2 37.72,104.52 35.56,106.68 35.56,108.18 D22.2 35.89,109.55 36.83,110.49 36.83,112.82 VIBE-21.1
GND22
  Top 0.406: M23.P$2 60.58,104.52 58.42,106.68 58.42,108.18 D23.2 58.75,109.55 59.69,110.49 59.69,112.82 VIBE-22.1
GND23
  Top 0.406: M24.P$2 83.44,104.52 81.28,106.68 81.28,108.18 D24.2 81.61,109.55 82.55,110.49 82.55,112.82 VIBE-23.1
GND24
  Top 0.406: M25.P$2 106.3,104.52 104.14,106.68 104.14,108.18 D25.2 104.47,109.55 105.41,110.49 105.41,112.82 VIBE-24.1
N$1
  Top 0.406: R1.1 23.24,14.63 M1.P$1 23.24,13.59 21.59,15.24 16.38,15.24 15.88,14.73 15.37,14.73 D1.1
N$2
  Top 0.406: R2.1 46.1,14.63 M2.P$1 46.1,13.59 44.45,15.24 39.24,15.24 38.73,14.73 38.23,14.73 D2.1
N$3
  Top 0.406: R3.1 68.96,14.63 M3.P$1 68.96,13.59 67.31,15.24 62.1,15.24 61.59,14.73 61.09,14.73 D3.1
N$4
  Top 0.406: R4.1 91.82,14.63 M4.P$1 91.82,13.59 90.17,15.24 84.96,15.24 84.45,14.73 83.95,14.73 D4.1
N$5
  Top 0.406: R5.1 114.68,14.63 M5.P$1 114.68,13.59 113.03,15.24 107.82,15.24 107.31,14.73 106.81,14.73 D5.1
N$6
  Top 0.406: R6.1 23.24,37.49 M6.P$1 23.24,36.45 21.59,38.1 16.38,38.1 15.88,37.59 15.37,37.59 D6.1
N$7
  Top 0.406: R7.1 46.1,37.49 M7.P$1 46.1,36.45 44.45,38.1 39.24,38.1 38.73,37.59 38.23,37.59 D7.1
N$8
  Top 0.406: R8.1 68.96,37.49 M8.P$1 68.96,36.45 67.31,38.1 62.1,38.1 61.59,37.59 61.09,37.59 D8.1
N$9
  Top 0.406: R9.1 91.82,37.49 M9.P$1 91.82,36.45 90.17,38.1 84.96,38.1 84.45,37.59 83.95,37.59 D9.1
N$10
  Top 0.406: R10.1 114.68,37.49 M10.P$1 114.68,36.45 113.03,38.1 107.82,38.1 107.31,37.59 106.81,37.59 D10.1
N$11
  Top 0.406: R11.1 23.24,60.35 M11.P$1 23.24,59.31 21.59,60.96 16.38,60.96 15.88,60.45 15.37,60.45 D11.1
N$12
  Top 0.406: R12.1 46.1,60.35 M12.P$1 46.1,59.31 44.45,60.96 39.24,60.96 38.73,60.45 38.23,60.45 D12.1
N$13
  Top 0.406: R13.1 68.96,60.35 M13.P$1 68.96,59.31 67.31,60.96 62.1,60.96 61.59,60.45 61.09,60.45 D13.1
N$14
  Top 0.406: R14.1 91.82,60.35 M14.P$1 91.82,59.31 90.17,60.96 84.96,60.96 84.45,60.45 83.95,60.45 D14.1
N$15
  Top 0.406: R15.1 114.68,60.35 M15.P$1 114.68,59.31 113.03,60.96 107.82,60.96 107.31,60.45 106.81,60.45 D15.1
N$16
  Top 0.406: R16.1 23.24,83.21 M16.P$1 23.24,82.17 21.59,83.82 16.38,83.82 15.88,83.31 15.37,83.31 D16.1
N$17
  Top 0.406: R17.1 46.1,83.21 M17.P$1 46.1,82.17 44.45,83.82 39.24,83.82 38.73,83.31 38.23,83.31 D17.1
N$18
  Top 0.406: R18.1 68.96,83.21 M18.P$1 68.96,82.17 67.31,83.82 62.1,83.82 61.59,83.31 61.09,83.31 D18.1
N$19
  Top 0.406: R19.1 91.82,83.21 M19.P$1 91.82,82.17 90.17,83.82 84.96,83.82 84.45,83.31 83.95,83.31 D19.1
N$20
  Top 0.406: R20.1 114.68,83.21 M20.P$1 114.68,82.17 113.03,83.82 107.82,83.82 107.31,83.31 106.81,83.31 D20.1
N$21
  Top 0.406: R21.1 23.24,106.07 M21.P$1 23.24,105.03 21.59,106.68 16.38,106.68 15.88,106.17 15.37,106.17 D21.1
N$22
  Top 0.406: R22.1 46.1,106.07 M22.P$1 46.1,105.03 44.45,106.68 39.24,106.68 38.73,106.17 38.23,106.17 D22.1
N$23
  Top 0.406: R23.1 68.96,106.07 M23.P$1 68.96,105.03 67.31,106.68 62.1,106.68 61.59,106.17 61.09,106.17 D23.1
N$24
  Top 0.406: R24.1 91.82,106.07 M24.P$1 91.82,105.03 90.17,106.68 84.96,106.68 84.45,106.17 83.95,106.17 D24.1
N$25
  Top 0.406: R25.1 114.68,106.07 M25.P$1 114.68,105.03 113.03,106.68 107.82,106.68 107.31,106.17 106.81,106.17 D25.1

## Text on the board
Bottom: v11 | v11 | v11 | v11 | v11 | v11 | v11 | v11 | v11 | v11 | v11 | v11 | v11 | v11 | v11 | v11 | v11 | v11 | v11 | v11 | v11 | v11 | v11 | v11 | v11
tPlace: + | + | + | + | + | - | - | - | - | - | + | + | + | + | + | - | - | - | - | - | + | + | + | + | + | - | - | - | - | - | + | + | + | + | + | - | - | - | - | - | + | + | + | + | + | - | - | - | - | -